# EAGLE board v4.1 Sensor (EAGLE 9.6.2)
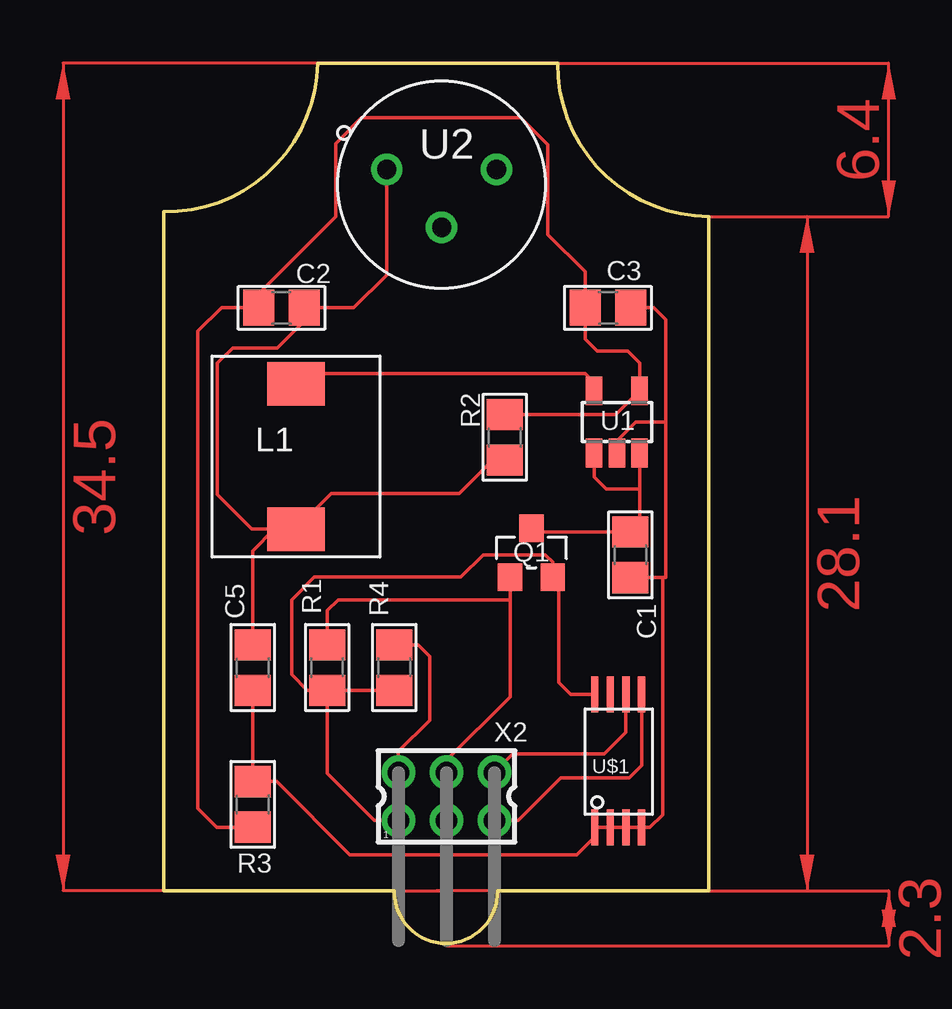
[diagram p0: board, top side]
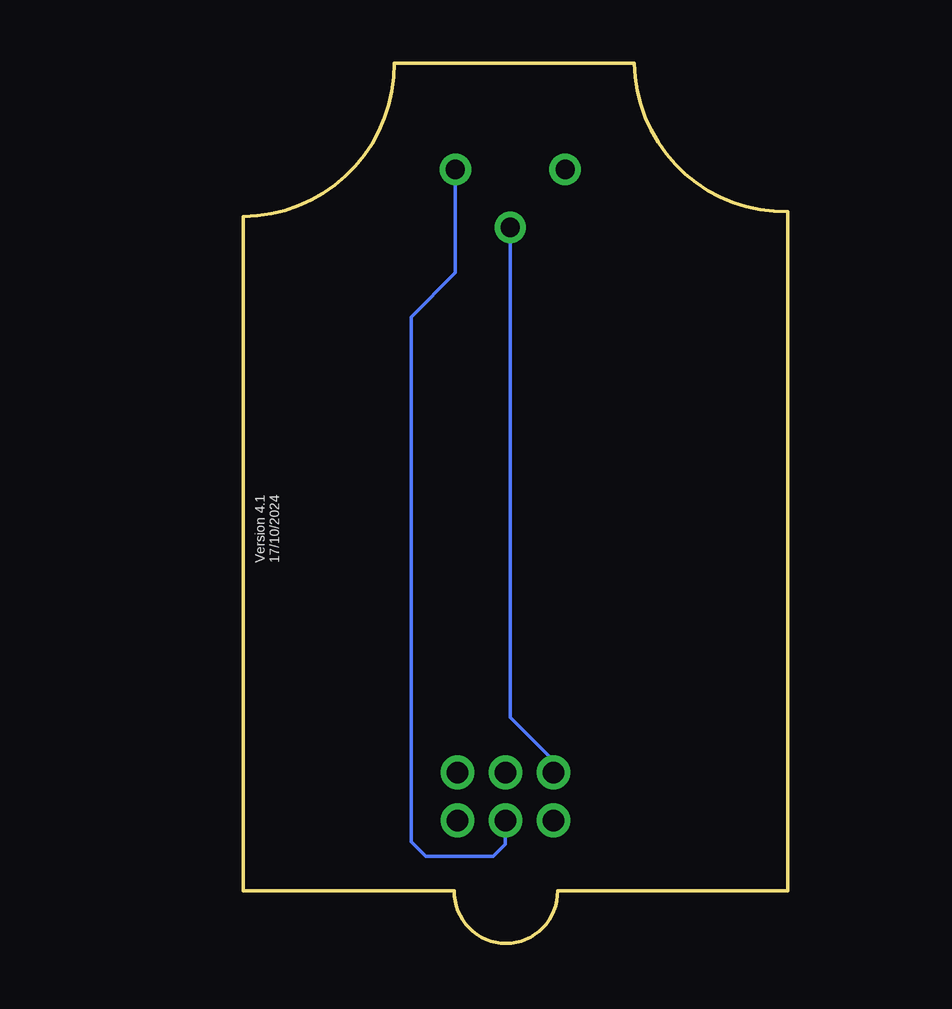
[diagram p1: board, bottom side, seen from below]

Size 22.7 x 36.7 mm. Coordinates in mm from the lower left corner, seen from the top.
Outline: 0,30.5 0,2.2 9.6,2.2 arc183 13.9,2.2 22.7,2.2 22.7,30.3 arc-90 16.4,36.7 6.4,36.7 arc-90 0,30.5
Copper layers (1*16): Top 0.035mm / dielectric 1.5mm / Bottom 0.035mm
Design rules "default": minimum track width 6mil, minimum drill 0.35mm, track to track 6mil, track to pad 6mil, pad to pad 6mil, via to via 6mil, smd to smd 6mil, copper to edge 40mil, drill to drill 6mil, minimum pad ring 10mil, minimum via ring 8mil, stop-mask expansion 4mil, vias tented up to drill 0mil, thermal gap 10mil

## Footprints (pad centres in the part's own frame; a part is rotated, then mirrored left to right if it is on the bottom)
0805 = smd 1.3 x 1.5: 1 -0.95,0; 2 0.95,0
SDR7045-100M = smd 1.8 x 2.4: 1 -3.031,0; 2 3.031,0
SOT23 = smd 1.016 x 1.143: 1 -0.889,-1.016; 2 0.889,-1.016; 3 0,1.016
SOT23-5 = smd 0.69 x 1.2: 1 -0.95,-1.3; 2 0,-1.3; 3 0.95,-1.3; 4 0.95,1.3; 5 -0.95,1.3
MQ303A = drill 0.8: 1 -2.286,0.635; 2 0,-1.778; 3 2.286,0.635
DECADE-AT24CXX = smd 1.5 x 0.3: A0 -2.75,1; A1 -2.75,0.35; A2 -2.75,-0.3; GND -2.75,-0.95; SCL 2.8,-0.3; SDA 2.8,-0.95; VCC 2.8,1; WP 2.8,0.35
332-06 = drill 0.9 pad 1.27: 1 -2,-1; 2 -2,1; 3 0,-1; 4 0,1; 5 2,-1; 6 2,1

## Placement (x,y rotation side)
C1  10µF  [0805]  19.43,16.2 270 top
C2  100nF  [0805]  4.9,26.5 180 top
C3  100nF  [0805]  18.5,26.5 0 top
C5  4,7uF  [0805]  3.7,11.5 270 top
L1  10uH  [SDR7045-100M]  5.5,20.3 90 top
Q1  Si2305DS  [SOT23]  15.31,16.29 0 top
R1  1K  [0805]  6.8,11.5 90 top
R2  16K  [0805]  14.2,21.1 270 top
R3  20K  [0805]  3.7,5.8 270 top
R4  10K  [0805]  9.6,11.5 90 top
U1  TPS62200  [SOT23-5]  18.87,21.74 0 top
U2  MQ303A  [MQ303A]  11.57,31.63 0 top
U$1  DECADE-AT24C256-10TI-2.7  [DECADE-AT24CXX]  18.95,7.58 90 top
X2  332-06  [332-06]  11.77,6.13 0 top

## Library data of the parts
C1 = microbuilder; MPN: GRM21BR71A106KA73K
C2 C3 = microbuilder; MPN: C0805C104K8RACAUTO
C5 = microbuilder; MPN: 0805ZG475ZAT4A
L1 = passives
Q1 = discrete; MPN: SI2305DS
R1 = microbuilder; MPN: RP73PF2A1K0BTDF
R2 = microbuilder; MPN: RK73H2ARTTD1602F
R3 = microbuilder; MPN: RCC080520K0FKEA
R4 = microbuilder; MPN: RCC080510K0FKEA
U1 = IC; MPN: TPS62200DBVR
U2 = MQ303A; MPN: MQ303B
U$1 = DECADE-libraries20151104; MPN: AT24C256-TSSOC
X2 = con-garry; MPN: 6 Pin - 2mm Dual Row

## Nets
0.9V: C2.1 C5.1 L1.1 R2.2 U2.1
A_OUT: R4.2 U2.2 X2.2
GND: C1.2 C3.2 C5.2 R3.1 U1.2 U2.3 U$1.A0 U$1.A1 U$1.A2 U$1.GND X2.3
HEAT: Q1.1 R1.2 X2.4
N$1: C1.1 Q1.3 U1.1 U1.3
N$2: L1.2 U1.5
N$3: C2.2 C3.1 R2.1 R3.2 U1.4
SCL: U$1.SCL X2.6
SDA: U$1.SDA X2.5
VCC: Q1.2 R1.1 R4.1 U$1.VCC X2.1
WP: U$1.WP

## Tracks (layer width: path | path; a pad name or v marks a point on that pad's centre or on a via)
0.9V
  Top 0.152: 6.4,26.5 7.92,26.5 9.28,27.87 U2.1 | 6.4,26.5 C2.1 | 6.4,26.5 4.73,24.83 2.86,24.83 2.23,24.2 2.23,18.71 3.67,17.27 L1.1 | R2.2 13.7,20.15 12.3,18.75 6.98,18.75 L1.1 | C5.1 3.7,16.37 4.6,17.27 L1.1
A_OUT
  Top 0.152: X2.2 9.77,8 11.08,9.31 11.08,11.97 10.6,12.45 R4.2
  Bottom 0.152: U2.2 11.57,9.43 9.77,7.63 X2.2
GND
  Top 0.152: 20.91,21.74 19.67,21.74 18.87,20.94 U1.2 | 20.91,21.74 20.91,15.25 C1.2 20.78,15.25 20.78,5.37 20.24,4.83 U$1.GND U$1.A2 U$1.A1 U$1.A0 17.95,4.45 17.2,3.7 11.77,3.7 X2.3 11.77,3.81 11.66,3.7 7.75,3.7 4.7,6.75 R3.1 C5.2 | 20.91,21.74 20.91,26 20.41,26.5 C3.2
  Bottom 0.152: U2.3 13.86,27.97 15.7,26.12 15.7,4.24 15.09,3.63 12.27,3.63 11.77,4.13 X2.3
HEAT
  Top 0.152: R1.2 6.8,13.87 7.25,14.33 14.42,14.33 | X2.4 11.77,7.62 14.42,10.27 14.42,14.33 | 14.42,14.33 Q1.1
N$1
  Top 0.152: Q1.3 15.47,17.15 C1.1 19.82,17.54 19.82,18.94 | 19.82,18.94 18.42,18.94 17.92,19.44 U1.1 | U1.3 19.82,18.94
N$2
  Top 0.152: U1.5 17.92,23.39 17.55,23.76 7.4,23.76 7.3,23.76 5.93,23.76 L1.2
N$3
  Top 0.152: R2.1 18.82,22.04 U1.4 19.82,24.2 19.32,24.7 18.05,24.7 17.55,25.2 C3.1 17.55,28 16,29.55 16,33.3 14.87,34.43 8.23,34.43 7.15,33.34 7.15,30.3 3.95,27.1 C2.2 2.4,26.5 1.42,25.52 1.42,5.63 2.2,4.85 R3.2
SCL
  Top 0.152: U$1.SCL 19.25,8.81 18.34,7.9 14.54,7.9 X2.6
SDA
  Top 0.152: X2.5 14.77,5.13 16.54,6.9 19.38,6.9 19.9,7.42 U$1.SDA
VCC
  Top 0.152: X2.1 8.77,5.13 6.8,7.1 R1.1 | R1.1 R4.1 | U$1.VCC 16.95,10.38 16.45,10.88 16.45,15.02 Q1.2 16.2,15.9 15.9,16.2 13.3,16.2 12.37,15.27 6.27,15.27 5.32,14.33 5.32,11.21 5.98,10.55 R1.1
(copper drawn outside any net)
  shapes: Top area x7

## Text on the board
bPlace: Version 4.1 / 17/10/2024
tNames: U$1